# Altium PCB DualWheatstoneAmplifierV1.PcbDoc
Units mil, origin at the board's own origin, x right, y up, seen from the top; angles counter-clockwise.
Board outline 2338.58 x 1574.8 mil, 4 copper layers (Top Routing, GND Plane, Power, Bottom Routing), stack 30.634 mil thick; 74 components, 49 nets, 263 pads, 42 vias.
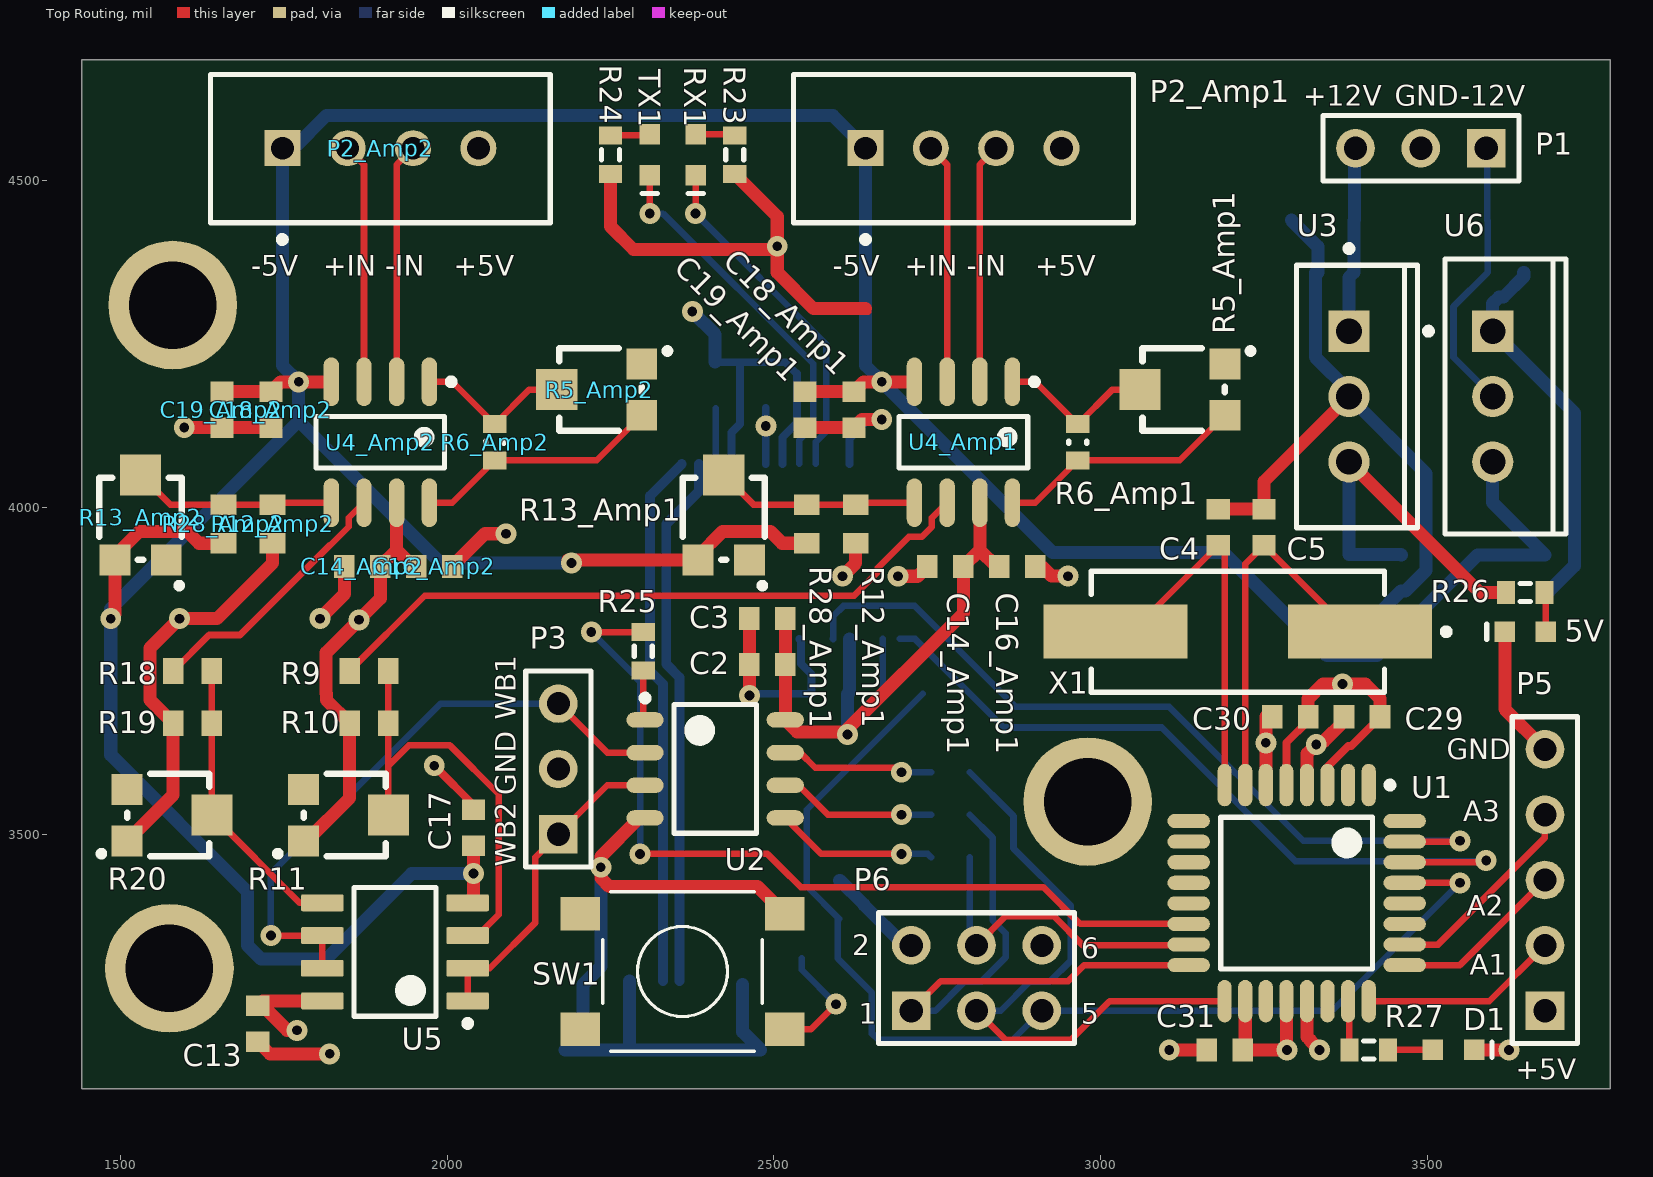
[diagram p0: Top Routing view]
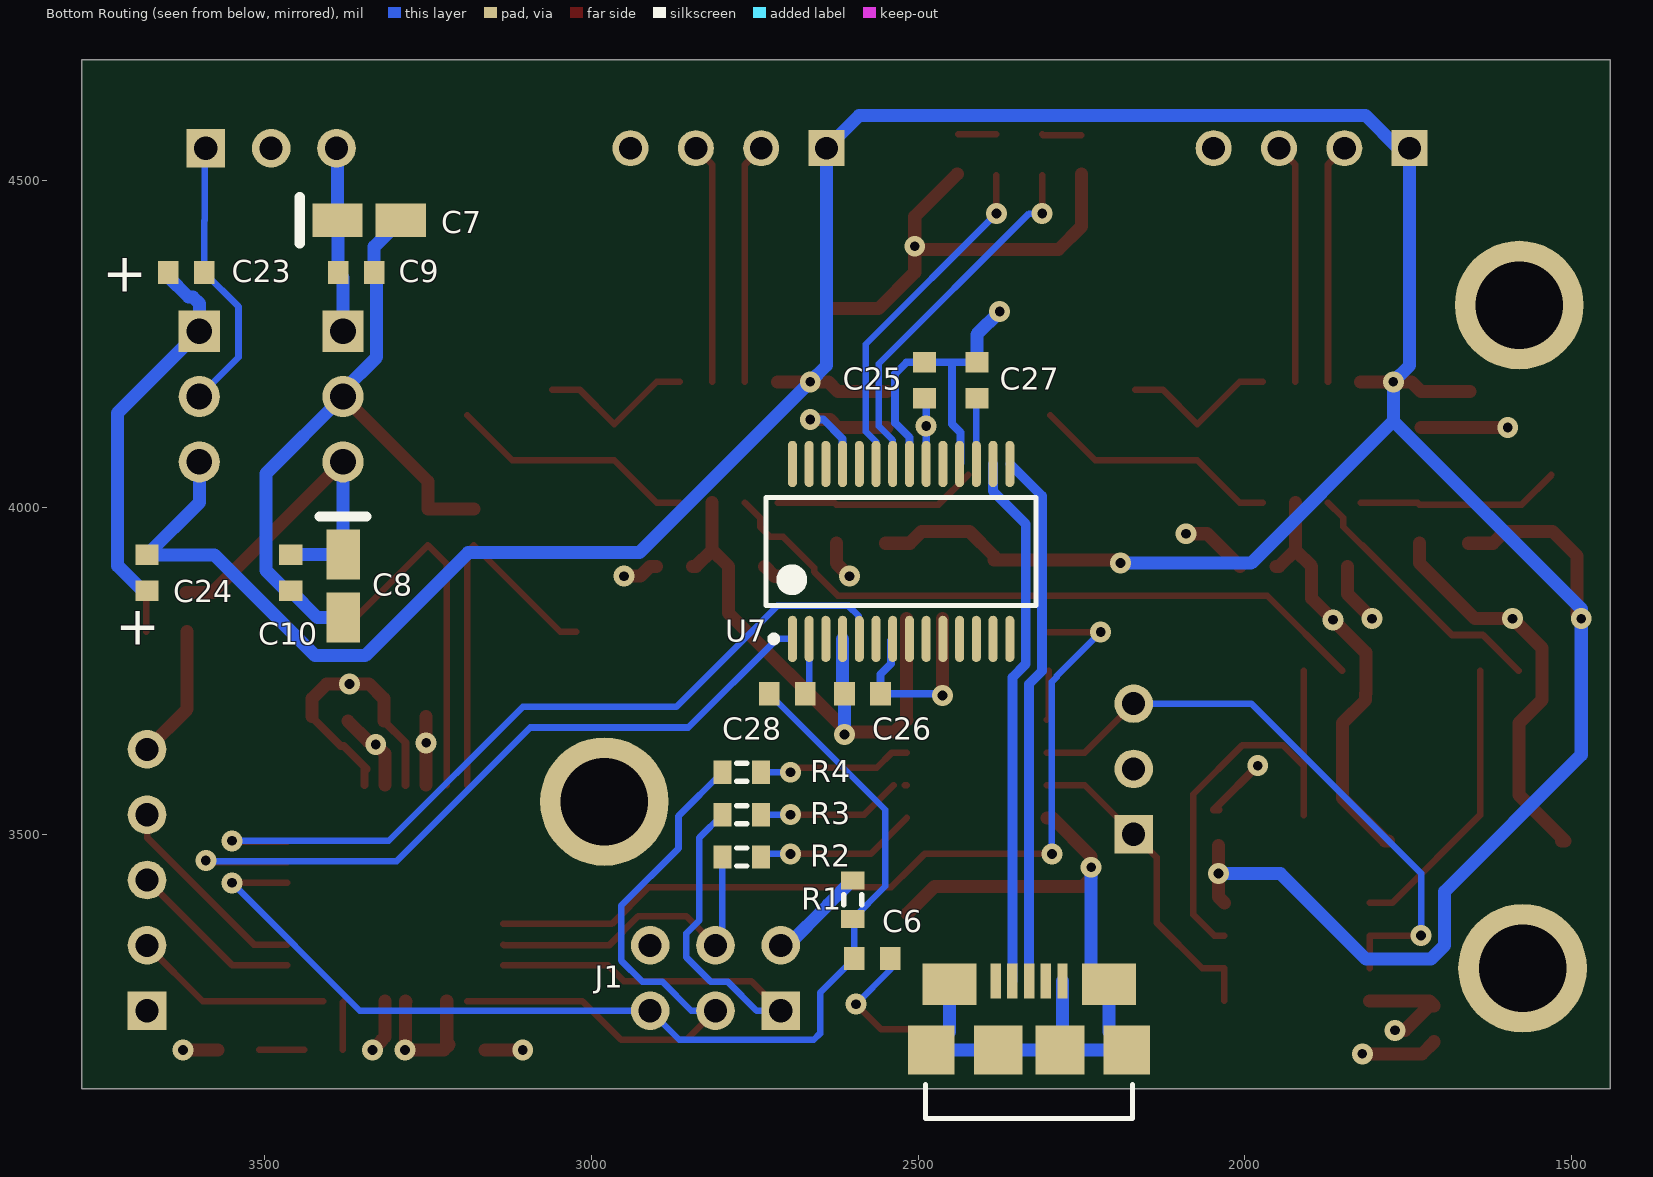
[diagram p1: Bottom Routing view, seen from below]
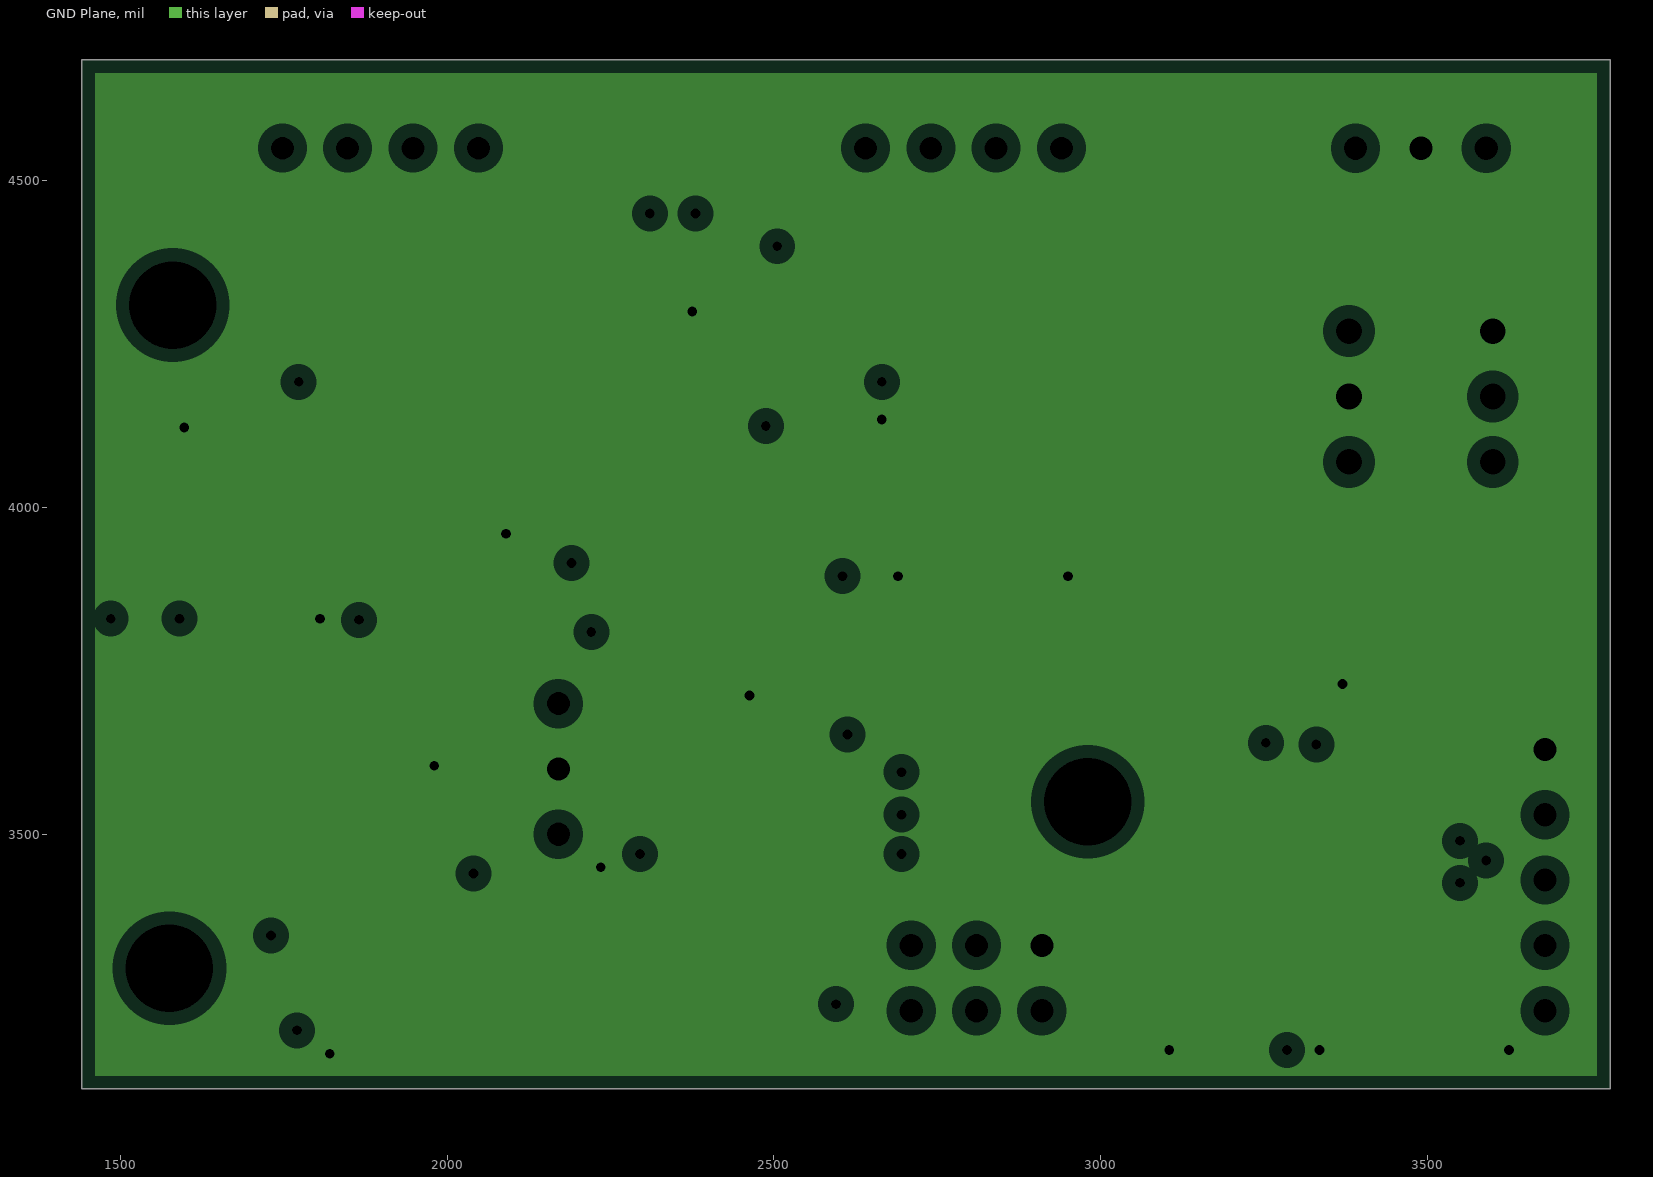
[diagram p2: GND Plane, clearances drawn from the general rule]
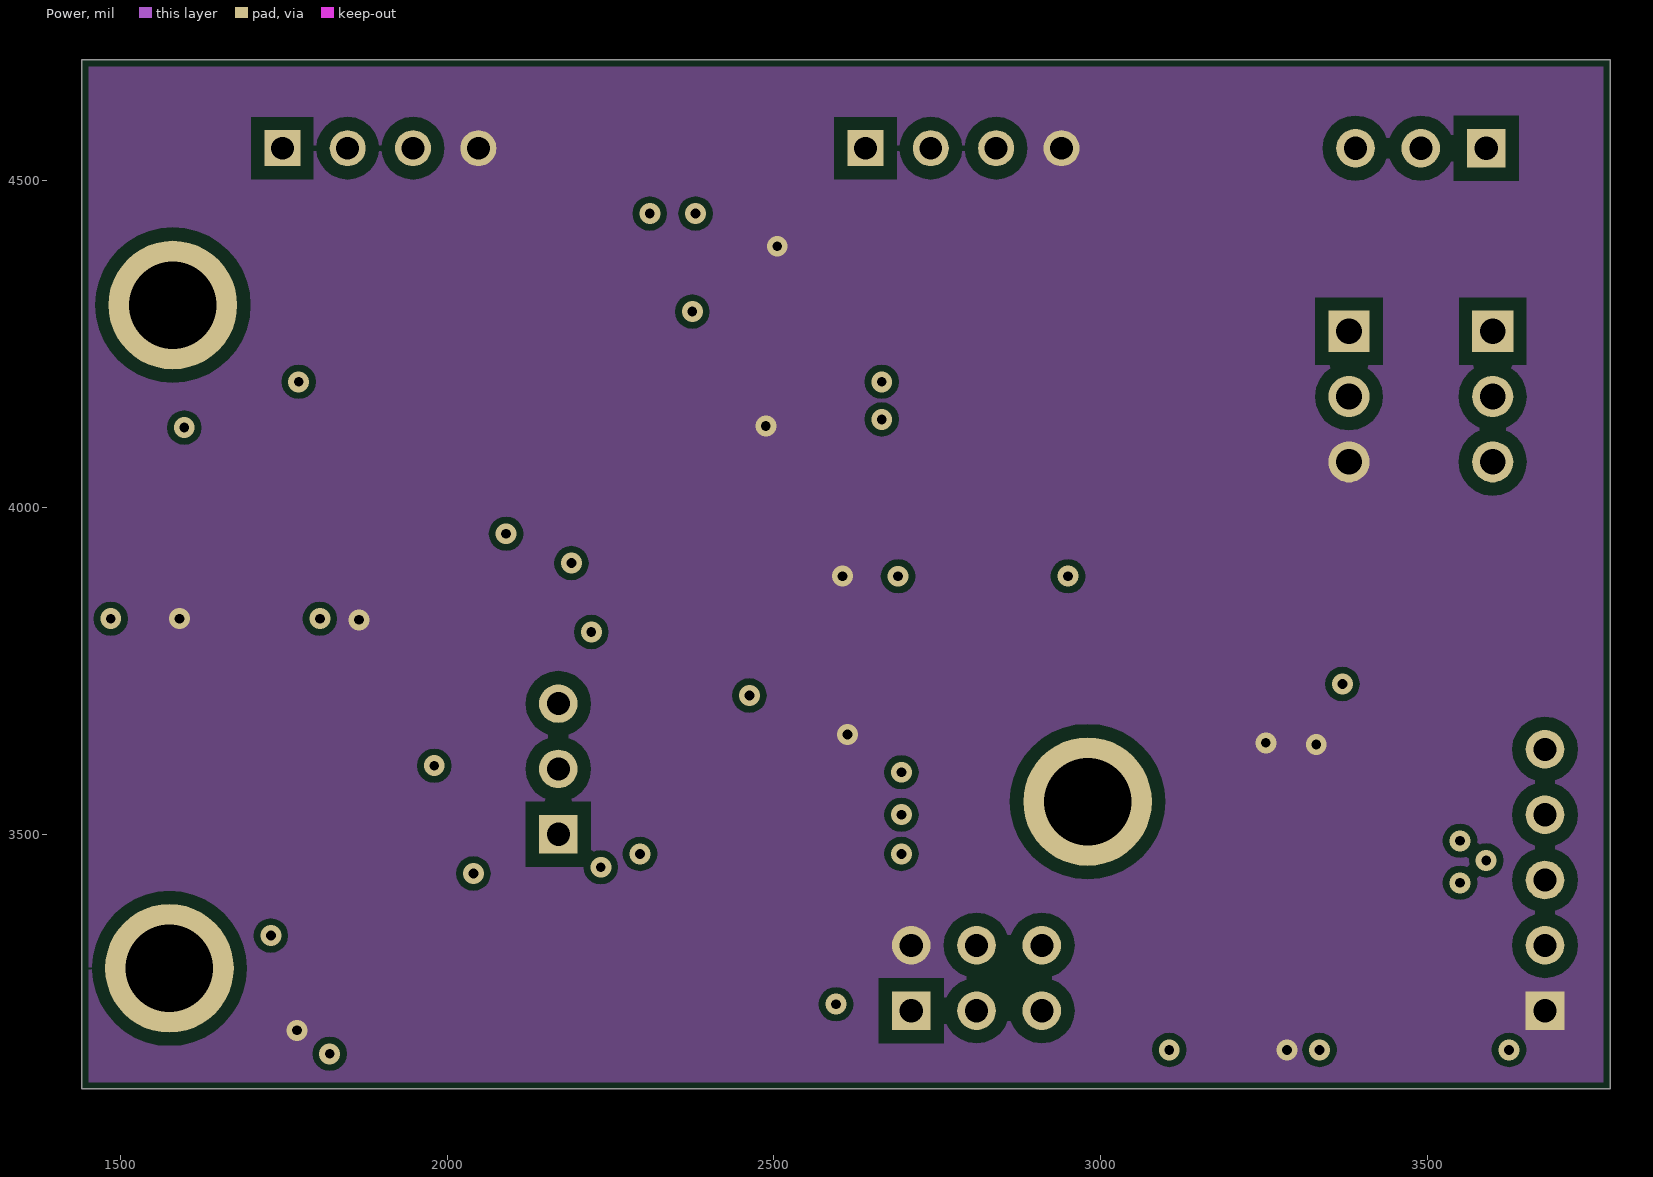
[diagram p3: Power]

## Layer stack, top to bottom
Top Solder: solder mask 0.4, Solder Resist, Dk 3.5
Top Routing: signal copper 1.4
Dielectric 1: core 10, FR-4, Dk 4.2
GND Plane: plane copper 1.417, net GND
Dielectric 3: prepreg 5, Dk 4.2
Power: signal copper 1.417
Dielectric 2: core 10, Dk 4.2
Bottom Routing: signal copper 1.4
Bottom Solder: solder mask 0.4, Solder Resist, Dk 3.5

## Board outline
3779.53,4685.04 1440.94,4685.04 1440.94,3110.24 3779.53,3110.24

## Design rules (kind name [scope] priority, off if disabled: settings)
BoardOutlineClearance [All] p1: gap=10 except(0: Arc-SplitContinuation Track-SplitContinuation SMDPad-SplitContinuation THPad-SplitContinuation Via-SplitContinuation Fill-SplitContinuation Poly-SplitContinuation Region-SplitContinuation Text-SplitContinuation)
Clearance [All] p1: gap=10 except(20: THPad-Poly)
DiffPairsRouting [All] p1: maxlimit=10 minlimit=10 mostfreqgap=10 toplayer_minwidth=15 toplayer_maxwidth=15 toplayer_prefwidth=15 midlayer1_minwidth=15 midlayer1_maxwidth=15 midlayer1_prefwidth=15 bottomlayer_minwidth=15 bottomlayer_maxwidth=15 bottomlayer_prefwidth=15 maxuncoupledlength=500
PlaneClearance [All] p1: clearance=20
PlaneConnect [All] p1: planeconnectstyle=Direct reliefexpansion=20 reliefentries=2 reliefconductorwidth=10 reliefairgap=10
PolygonConnect [All] p1: connectstyle=Direct reliefconductorwidth=10 reliefentries=4 polygonreliefangle="90 Angle" airgapwidth=10
RoomDefinition Amp1 [InComponentClass('Amp1')] p1: confinementstyle=ConfineIn formatcopy=TRUE lockcomponents=FALSE outline 2352.44,4670 2352.44,3880 3172.44,3880 3172.44,4670
RoomDefinition Amp2 [InComponentClass('Amp2')] p2: confinementstyle=ConfineIn formatcopy=TRUE lockcomponents=FALSE outline 1460,4670 1460,3880 2280,3880 2280,4670
RoutingVias [All] p1: holewidth=15 width=32 viastyle="Through Hole" minholewidth=15 minwidth=32 maxholewidth=15 maxwidth=32
SolderMaskExpansion [All] p1: expansion=4
Width Width_+12V [InNet('+12V')] p1: maxlimit=20 minlimit=20 preferedwidth=20
Width Width_GND [InNet('GND')] p2: maxlimit=20 minlimit=12 preferedwidth=20
Width Width_+5V [InNet('+5V')] p3: maxlimit=20 minlimit=12 preferedwidth=20
Width Width_-5V [InNet('-5V')] p4: maxlimit=20 minlimit=12 preferedwidth=20
Width [All] p5: maxlimit=10 minlimit=10 preferedwidth=10
27 further rules are at their usual default settings.

## Classes and differential pairs
channel class WheatstonePrimaryAmplifier: Amp1 Amp2
component class Amp2: C14_Amp2 C16_Amp2 C18_Amp2 C19_Amp2 P2_Amp2 R5_Amp2 R6_Amp2 R12_Amp2 R13_Amp2 R28_Amp2 U4_Amp2
component class Amp1: C14_Amp1 C16_Amp1 C18_Amp1 C19_Amp1 P2_Amp1 R5_Amp1 R6_Amp1 R12_Amp1 R13_Amp1 R28_Amp1 U4_Amp1
component class WB: C13 C17 P3 R9 R10 R11 R18 R19 R20 U5
component class F: C25 C26 C27 C28 J1 R23 R24 RX1 TX1 U7
component class Sheet1: 5V C2 C3 C4 C5 C6 C7 C8 C9 C10 C23 C24 C29 C30 C31 D1 P1 P5 P6 R1 R2 R3 R4 R25 R26 R27 SW1 U1 U2 U3 U6 X1
differential pair USB: +USB_P -USB_N

## Components (designator, comment, footprint, x,y, rotation, side; value= is the part's Value field where it differs from the comment)
5V "150060RS75000" 0603_A 3650,3810 r0 top
C2 "Cap Semi" 1608[0603] 2490,3760 r180 top
C3 "Cap Semi" 1608[0603] 2490,3830 r180 top
C4 "Cap Semi" 1608[0603] 3180,3970 r270 top
C5 "Cap Semi" 1608[0603] 3250,3970 r270 top
C6 "Cap Semi" 1608[0603] 2570,3310 r180 bottom
C7 "TAJA475K016RNJ" AVX-TAJ-A-2_N 3340,4440 r180 bottom
C8 "TAJA475K016RNJ" AVX-TAJ-A-2_N 3380,3880 r270 bottom
C9 "Cap Semi" 1608[0603] 3360,4360 r180 bottom
C10 "Cap Semi" 1608[0603] 3460,3900 r270 bottom
C13 "Cap Semi" 1608[0603] 1710,3210 r270 top
C14_Amp1 "Cap Semi" 1608[0603] 2762.44,3910 r180 top (schematic designator C14)
C14_Amp2 "Cap Semi" 1608[0603] 1870,3910 r180 top (schematic designator C14)
C16_Amp1 "Cap Semi" 1608[0603] 2872.44,3910 r0 top (schematic designator C16)
C16_Amp2 "Cap Semi" 1608[0603] 1980,3910 r0 top (schematic designator C16)
C17 "Cap Semi" 1608[0603] 2040,3510 r90 top
C18_Amp1 "Cap Semi" 1608[0603] 2622.44,4150 r270 top (schematic designator C18)
C18_Amp2 "Cap Semi" 1608[0603] 1730,4150 r270 top (schematic designator C18)
C19_Amp1 "Cap Semi" 1608[0603] 2547.44,4150 r270 top (schematic designator C19)
C19_Amp2 "Cap Semi" 1608[0603] 1655,4150 r270 top (schematic designator C19)
C23 "Cap Semi" 1608[0603] 3620,4360 r0 bottom
C24 "Cap Semi" 1608[0603] 3680,3900 r270 bottom
C25 "Cap Semi" 1608[0603] 2490,4195 r90 bottom
C26 "Cap Semi" 1608[0603] 2585,3715 r0 bottom
C27 "Cap Semi" 1608[0603] 2410,4195 r270 bottom
C28 "Cap Semi" 1608[0603] 2700,3715 r0 bottom
C29 "Cap Semi" 1608[0603] 3400,3680 r0 top
C30 "Cap Semi" 1608[0603] 3290,3680 r0 top
C31 "Cap Semi" 1608[0603] 3190,3170 r180 top
D1 "150060RS75000" 0603_A 3540,3170 r180 top
J1 "10118192-0001LF" FCI-10118192-0001LF-5_V 2330,3170 r180 bottom
P1 "Header 3" HDR1X3 3590,4550 r180 top
P2_Amp1 "SG" TECO-5-103414-2_V 2790,4550 r0 top (schematic designator P2)
P2_Amp2 "SG" TECO-5-103414-2_V 1897.56,4550 r0 top (schematic designator P2)
P3 "Header 3" HDR1X3 2170,3500 r90 top
P5 "Header 5" HDR1X5 3680,3230 r90 top
P6 "Header 3X2" HDR2X3 2710,3230 r0 top
R1 "Res3" J1-0603 2600,3400 r90 bottom
R2 "Res3" J1-0603 2770,3465 r0 bottom
R3 "Res3" J1-0603 2770,3530 r0 bottom
R4 "Res3" J1-0603 2770,3595 r0 bottom
R5_Amp1 "500" Trimpot_Cut_tape_3.4x3.4x2 3190,4220 r270 top (schematic designator R5)
R5_Amp2 "500" Trimpot_Cut_tape_3.4x3.4x2 2297.56,4220 r270 top (schematic designator R5)
R6_Amp1 "510" RESC0603(1608)_L 2965,4100 r90 top (schematic designator R6)
R6_Amp2 "510" RESC0603(1608)_L 2072.56,4100 r90 top (schematic designator R6)
R9 "10k" RESC1608X55X25ML10T15 1880,3750 r180 top
R10 "200K" RESC1608X55X25ML10T15 1880,3670 r0 top
R11 "20k" Trimpot_Cut_tape_3.4x3.4x2 1780,3490 r90 top
R12_Amp1 "1k" RESC1608X55X25ML10T15 2625,3975 r270 top (schematic designator R12)
R12_Amp2 "1k" RESC1608X55X25ML10T15 1732.56,3975 r270 top (schematic designator R12)
R13_Amp1 "20k" Trimpot_Cut_tape_3.4x3.4x2 2462.44,3920 r180 top (schematic designator R13)
R13_Amp2 "20k" Trimpot_Cut_tape_3.4x3.4x2 1570,3920 r180 top (schematic designator R13)
R18 "10k" RESC1608X55X25ML10T15 1610,3750 r180 top
R19 "200K" RESC1608X55X25ML10T15 1610,3670 r0 top
R20 "20k" Trimpot_Cut_tape_3.4x3.4x2 1510,3490 r90 top
R23 "Res3" J1-0603 2440,4540 r90 top
R24 "Res3" J1-0603 2250,4540 r90 top
R25 "Res3" J1-0603 2300,3780 r90 top
R26 "Res3" J1-0603 3650,3870 r180 top
R27 "Res3" J1-0603 3410,3170 r180 top
R28_Amp1 "1k" RESC1608X55X25ML10T15 2550,3975 r90 top (schematic designator R28)
R28_Amp2 "1k" RESC1608X55X25ML10T15 1657.56,3975 r90 top (schematic designator R28)
RX1 "150060RS75000" 0603_A 2380,4540 r90 top
SW1 "430152043826" 430152043826 2360,3290 r180 top
TX1 "150060RS75000" 0603_A 2310,4540 r90 top
U1 "ATmega88PA-AUR" 32A_N 3300,3410 r270 top
U2 "ADC_LTC1865" LTC1865_SOIC8 2410,3600 r0 top
U3 "LM7805ACT" FAIR-TO-220-3 3380,4170 r0 top
U4_Amp1 "LT1920" LT-S8-8_L 2790,4100 r270 top (schematic designator U4)
U4_Amp2 "LT1920" LT-S8-8_L 1897.56,4100 r270 top (schematic designator U4)
U5 "NE5532ADR" D0008A_M 1920,3320 r180 top
U6 "LM7905CT/NOPB" NDE0003A 3600,4170 r270 top
U7 "FT232RL-Reel" SSOP-28_L 2525.91,3932.91 r90 bottom
X1 "ABLS2-16.000MHZ-D4Y-T" ABRA-ABLS2-2_V 3210,3810 r180 top

## Footprints (in the part's own frame and the unit in brackets; to place one, negate y for a bottom-side part, rotate by r counter-clockwise, add the part's x,y. Pads: shape width x height; smd on the part's side, far side on the other; paste and mask are expansions set on the pad)
32A_N [mm] "Thin QFP, 32-Leads, Body 7x7mm, Pitch 0.8mm, IPC Medium Density"
  oval 1.65x0.55 smd: 1(-4.2,2.8) 2(-4.2,2) 3(-4.2,1.2) 4(-4.2,0.4) 5(-4.2,-0.4) 6(-4.2,-1.2) 7(-4.2,-2) 8(-4.2,-2.8) 17(4.2,-2.8) 18(4.2,-2) 19(4.2,-1.2) 20(4.2,-0.4) 21(4.2,0.4) 22(4.2,1.2) 23(4.2,2) 24(4.2,2.8)
  oval 0.55x1.65 smd: 9(-2.8,-4.2) 10(-2,-4.2) 11(-1.2,-4.2) 12(-0.4,-4.2) 13(0.4,-4.2) 14(1.2,-4.2) 15(2,-4.2) 16(2.8,-4.2) 25(2.8,4.2) 26(2,4.2) 27(1.2,4.2) 28(0.4,4.2) 29(-0.4,4.2) 30(-1.2,4.2) 31(-2,4.2) 32(-2.8,4.2)
  silkscreen extent -4.32,-2.95 2.95,3.75, body extent -3.5,-3.5 3.5,3.5, height 1.2
0603_A [mm] "Chip LED, 2-Leads, Body 1.6x0.8mm, IPC Medium Density"
  rect 0.8x0.8 smd: 1(-0.8,0) 2(0.8,0)
  silkscreen extent -1.5,-0.3 -1.5,0.3, body extent -0.8,-0.4 0.8,0.4, height 0.7
1608[0603] [mm] "Chip Capacitor, Body 1.6x0.8mm, IPC High Density"
  rect 0.8x0.9 smd: 1(-0.7,0) 2(0.7,0)
  body extent -0.87,-0.48 0.87,0.48, height 1.3
430152043826 [mm] "6*6mm vertical type, SMD, height 4.3mm, white actuator, 260gf, T&R"
  rect 1.55x1.3 smd: 1(-3.975,2.25) 2(-3.975,-2.25) 3(3.975,2.25) 4(3.975,-2.25)
  silkscreen extent -3.1,-3.1 3.1,3.1, body extent -4.5,-3.1 4.5,3.1, height 4.29
ABRA-ABLS2-2_V [mm] "SMD, 2-Leads, Body 11.4x4.7mm, Height 3.3mm"
  rect 5.6x2.1 smd: 1(-4.75,0) 2(4.75,0)
  silkscreen extent -8.23,-2.35 5.7,2.35, body extent -5.7,-2.35 5.7,2.35, height 3.3
AVX-TAJ-A-2_N [mm] "Molded Capacitor, 2-Leads, Body 3.4x1.8mm, IPC Medium Density"
  rect 1.95x1.3 smd: 1(-1.225,0) 2(1.225,0)
  silkscreen extent -2.7,-0.9 -2.7,0.9, body extent -1.92,-0.9 1.92,0.9, height 1.8
D0008A_M [mm] "SOIC, 8-Leads, Body 5x4mm, Pitch 1.27mm, IPC Low Density"
  rrect15% 1.65x0.65 smd: 1(-2.825,1.905) 2(-2.825,0.635) 3(-2.825,-0.635) 4(-2.825,-1.905) 5(2.825,-1.905) 6(2.825,-0.635) 7(2.825,0.635) 8(2.825,1.905)
  silkscreen extent -2.95,-2.5 1.6,2.9, body extent -3,-2.45 3,2.45, height 1.63
FAIR-TO-220-3 [mm] "FM, 3-Leads, Body 10.2x4.7mm, Pitch 2.54mm"
  rect 1.6x1.6 hole 1: 1(0,2.54)
  round 1.6 hole 1: 2(0,0) 3(0,-2.54)
  silkscreen extent -2.04,-5.1 2.66,5.87, body extent -2.04,-5.1 2.66,5.1, height 18.95
FCI-10118192-0001LF-5_V [mm] "SMD, 5-Leads, Body 8.05x5.77mm, Pitch 0.65mm"
  rect 0.4x1.35 smd: 1(-1.3,2.675) 2(-0.65,2.675) 3(0,2.675) 4(0.65,2.675) 5(1.3,2.675)
  rect 2.1x1.6 smd: 6(-3.1,2.55) 7(3.1,2.55)
  rect 1.8x1.9 smd: 8(-3.8,0) 9(3.8,0)
  rect 1.9x1.9 smd: 10(-1.2,0) 11(1.2,0)
  silkscreen extent -4.03,-2.67 4.03,-1.35, body extent -4.03,-2.67 4.03,3.1, height 2.7
HDR1X3 [mm] "Connector; Header; 3 Position"
  rect 1.5x1.5 hole 0.9: 1(0,0)
  round 1.5 hole 0.9: 2(2.54,0) 3(5.08,0)
  silkscreen extent -1.27,-1.27 6.35,1.27
HDR1X5 [mm] "Connector; Header; 5 Position"
  rect 1.5x1.5 hole 0.9: 1(0,0)
  round 1.5 hole 0.9: 2(2.54,0) 3(5.08,0) 4(7.62,0) 5(10.16,0)
  silkscreen extent -1.27,-1.27 11.43,1.27
HDR2X3 [mm] "Connector; Header; 3x2 Position"
  rect 1.5x1.5 hole 0.9: 1(0,0)
  round 1.5 hole 0.9: 2(0,2.54) 3(2.54,0) 4(2.54,2.54) 5(5.08,0) 6(5.08,2.54)
  silkscreen extent -1.27,-1.27 6.35,3.81
J1-0603 [mm] "Chip Resistor, Body 1.6x0.8mm, IPC High Density"
  rect 0.7x0.9 smd: 1(-0.75,0) 2(0.75,0)
  silkscreen extent -0.2,-0.35 0.2,0.35, body extent -0.85,-0.48 0.85,0.48, height 0.9
LT-S8-8_L [mm] "SOIC, 8-Leads, Body 4.9x3.9mm, Pitch 1.27mm, IPC High Density"
  oval 1.9x0.6 smd: 1(-2.35,1.905) 2(-2.35,0.635) 3(-2.35,-0.635) 4(-2.35,-1.905) 5(2.35,-1.905) 6(2.35,-0.635) 7(2.35,0.635) 8(2.35,1.905)
  silkscreen extent -2.47,-2.5 1,2.88, body extent -2,-2.5 2,2.5, height 1.76
LTC1865_SOIC8 [mm] "SOIC, 8-Leads, Body 4.90x3.90mm, Pitch 1.27mm, IPC Medium Density"
  oval 1.45x0.6 smd: 1(-2.725,1.905) 2(-2.725,0.635) 3(-2.725,-0.635) 4(-2.725,-1.905) 5(2.725,-1.905) 6(2.725,-0.635) 7(2.725,0.635) 8(2.725,1.905)
  silkscreen extent -2.85,-2.5 1.6,2.88, body extent -2,-2.5 2,2.5, height 1.76
NDE0003A [mm] "FM, 3-Leads, Body 10.7x4.7mm, Pitch 2.54mm"
  rect 1.6x1.6 hole 1: 1(-2.54,0)
  round 1.6 hole 1: 2(0,0) 3(2.54,0)
  silkscreen extent -5.35,-2.62 5.35,2.85, body extent -5.4,-1.9 5.4,2.9, height 19.4
RESC0603(1608)_L [mm] "Chip Resistor, Body 1.6x0.8mm, IPC High Density"
  rect 0.7x0.9 smd: 1(-0.7,0) 2(0.7,0)
  silkscreen extent -0.05,-0.35 0.05,0.35, body extent -0.85,-0.47 0.85,0.47, height 0.6
RESC1608X55X25ML10T15 [mm] "Chip Resistor, 2-Leads, Body 1.70x0.90mm, IPC Low Density"
  rect 0.8x1 smd: 1(-0.75,0) 2(0.75,0)
  body extent -0.85,-0.45 0.85,0.45, height 0.55
SSOP-28_L [mm] "SOP, 28-Leads, Body 10.2x5.3mm, Pitch 0.65mm, IPC High Density"
  oval 1.8x0.35 smd: 1(-3.4,4.225) 2(-3.4,3.575) 3(-3.4,2.925) 4(-3.4,2.275) 5(-3.4,1.625) 6(-3.4,0.975) 7(-3.4,0.325) 8(-3.4,-0.325) 9(-3.4,-0.975) 10(-3.4,-1.625) 11(-3.4,-2.275) 12(-3.4,-2.925) 13(-3.4,-3.575) 14(-3.4,-4.225) 15(3.4,-4.225) 16(3.4,-3.575) 17(3.4,-2.925) 18(3.4,-2.275) 19(3.4,-1.625) 20(3.4,-0.975) 21(3.4,-0.325) 22(3.4,0.325) 23(3.4,0.975) 24(3.4,1.625) 25(3.4,2.275) 26(3.4,2.925) 27(3.4,3.575) 28(3.4,4.225)
  silkscreen extent -3.52,-5.25 2.1,5.25, body extent -2.8,-5.25 2.8,5.25, height 2
TECO-5-103414-2_V [mm] "Male Header, 4-Leads, Body 5.7658 x 13.208mm, Pitch 2.54mm"
  rect 1.4x1.4 hole 0.889: 1(-3.81,0)
  round 1.4 hole 0.889: 2(-1.27,0) 3(1.27,0) 4(3.81,0)
  silkscreen extent -6.6,-3.67 6.6,2.87, body extent -6.6,-2.89 6.6,2.87, height 13.94
Trimpot_Cut_tape_3.4x3.4x2 [mm]
  rect 1.2x1.2 smd: 1(0,0) 3(2,0)
  rect 1.6x1.6 smd: 2(1,-3.3)
  silkscreen extent -0.6,-3.2 2.6,1.1

## Part data
5V D1 RX1 TX1: library part CMP-1426-00001-1, "SMD mono-color Chip LED, WL-SMCW, Red"
C2 C3 C4 C5 C6 C9 C10 C13 C14_Amp1 C14_Amp2 C16_Amp1 C16_Amp2 C17 C18_Amp1 C18_Amp2 C19_Amp1 C19_Amp2 C23 C24 C25 C26 C27 C28 C29 C30 C31: "Capacitor (Semiconductor SIM Model)"
C7 C8: library part CMP-2100-03687-1, "Standard Tantalum, 4.7 uF, +/- 10%, 16 V, -55 to 125 degC, 2-Pin SMD (1206), RoHS, Tape and Reel"
J1: library part CMP-2000-05118-1, "Micro USB B Type Receptacle, -55 to 85 degC, 5-Pin SMD, RoHS, Tape and Reel"
P1 P3: "Header, 3-Pin"
P2_Amp1 P2_Amp2: library part CMP-2000-05625-1, "Male Header, Pitch 2.54 mm, 1 x 4 Position, Height 14.199 mm, Tail Length 3.302 mm, -55 to 105 degC, RoHS, Rail/Tube"
P5: "Header, 5-Pin"
P6: "Header, 3-Pin, Dual row"
R1 R2 R3 R4 R23 R24 R25 R26 R27: "Resistor"
R5_Amp1 R5_Amp2 R11 R13_Amp1 R13_Amp2 R20: library part Component_1
R6_Amp1 R6_Amp2: library part CMP-1012-00067-1, "510R 0.1W 5% 0603 (1608 Metric)  SMD"
R9 R10 R12_Amp1 R12_Amp2 R18 R19 R28_Amp1 R28_Amp2: library part CMP-1659-00009-3, "Chip Resistor, 1 KOhm, +/-1%, 0.1 W, -55 to 155 degC, 0603 (1608 Metric), RoHS, Tape and Reel"
SW1: library part CMP-1452-00001-1, "WS-TASV SMD Tact Switch 6X6 mm"
U1: library part CMP-0095-00212-2, "8-bit AVR Microcontroller, 8KB Flash, 512 Bytes EEPROM, 1KB SRAM, 32-pin TQFP, Industrial Grade (-40°C to 85°C), Reel"
U3: library part CMP-2000-04937-1, "Positive Voltage Regulator, 5 V, 1 A, 0 to 125 degC, 3-Pin TO-220, RoHS, Tube"
U4_Amp1 U4_Amp2: library part CMP-0359-03370-2, "Single Channel, Resistor Gain Programmable, Precision Instrumentation Operational Amplifier, 0.8 MHz Typical GBW, 1.2 V/us Typical SR, 4.6 to 40 V, 8-Pin SOIC (S8-8), Commercial, Pb-Free"
U5: library part CMP-0017-00450-2, "Dual Low-Noise Operational Amplifier, 10 to 30 V, 0 to 70 degC, 8-pin SOIC (D8), Green (RoHS & no Sb/Br)"
U6: library part CMP-0062-02481-3, "3-Terminal Negative Regulator, 3-pin TO-220, Pb-Free"
U7: library part CMP-0078-00029-3, "USB UART Asynchronous Serial Data Transfer Chip, 28-pin SSOP, Tape and Reel"
X1: library part CMP-0277-00002-1, "Low Profile Surface Mount Microprocessor Crystal, 16.000 MHz +/-30 ppm, 180 Ohm, -40 to 85 degC, 2-Pin 11.4 x 4.7 x 3.3 mm SMD, RoHS, Tape and Reel"

## Free pads (board coordinates)
  round 196.85 hole 133.86: 0(1574.8,3294.82) 0(1580,4310) 0(2980,3550)

## Via types
v1: diameter 32, hole 15, Top Routing to Bottom Routing, 42 vias

## Nets (pads, with @x,y where several pads share a name; then routed paths per layer and width w, separated by ;. In a path a pad name is that pad's centre, name@x,y a point inside that pad or via, vN(x,y) a via of type N, cw(c..) or ccw(c..) an arc to the next point about the centre after c; other vN are vias at no path point)
+5V: C2.1 C3.1 C8.1 C10.1 C13.1 C14_Amp1.1 C14_Amp2.1 C16_Amp1.1 C16_Amp2.1 C25.1 C26.2 C29.1 C30.1 C31.1 P2_Amp1.4 P2_Amp2.4 P5.1 P6.2 R1.2 R10.1 R11.1 R12_Amp1.2 R12_Amp2.2 R19.1 R20.1 R23.1 R24.1 R26.2 U1.4 U1.6 U1.18 U1.20 U2.8 U3.3 U4_Amp1.7 U4_Amp2.7 U5.8 U7.4 U7.20 | length 4297.1
  Top Routing w10: 2640,4304.53 2644.53,4300
  Top Routing w20: R20.1@1515,3490 R20.1 1580.47,3560.47 R19.1 1544.72,3705.75 1544.72,3784.72 v1(1590,3830) 1647.56,3830 1732.56,3915 R12_Amp2.2 ; v1(1770,3200) 1755,3200 1717.44,3237.56 C13.1 1717.44,3245 U5.8 ; R11.1 1785,3490 1850.47,3555.47 R10.1 1815,3705.47 1815,3715.6 1814.72,3715.88 1814.72,3777.97 1897.56,3860.8 C14_Amp2.1 1922.56,3935 ; U4_Amp2.7 1922.56,3935 ; C16_Amp2.1 1947.56,3910 1922.56,3935 ; R24.1 2250,4430 2285,4395 2500,4395 v1(2505,4400) ; R23.1 2505,4445.47 v1(2505,4400) ; C3.1 C2.1 2517.56,3675.28 U2.8 2535.47,3656.81 2608.3,3656.81 2790,3838.51 C14_Amp1.1 2815,3935 ; v1(2605,3895) 2625,3915 R12_Amp1.2 ; 2640,4304.53 2560.47,4304.53 2505,4360 v1(2505,4400) ; U4_Amp1.7 2815,3935 ; C16_Amp1.1 2840,3910 2815,3935 ; U1.18 3221.26,3181.65 3217.56,3177.95 3225.51,3170 v1(3285,3170) 3284.25,3170.75 U1.20 U1.20@3283.58,3243.98 ; U1.6 C30.1@3252.76,3680 ; U1.4 3315.75,3623.31 3334.72,3642.28 3341.59,3642.28 C29.1@3372.44,3673.13 ; U3.3 3580,3870 R26.2
  Bottom Routing w12: U7.20 C25.1@2487.52,4152.44
  Bottom Routing w20: R1.2 2600.73,3429.53 2637.72,3392.54 2637.72,3391.81 2699.53,3330 P6.2 ; v1(2612.56,3652.56) C26.2 ; C26.2@2615,3717.56 2615.47,3718.03 U7.4 ; U3.3 C8.1 3459.33,3928.23 C10.1
  other v1: 3330,3637.56 3252.76,3640 1865,3828.24 2487.52,4125
+12V: C7.1 C9.1 P1.3 U3.1 | length 284.1
  Bottom Routing w20: U3.1 3380,4352.44 C9.1 3387.56,4439.33 C7.1 3388.23,4548.23 P1.3
-5V: C17.1 C18_Amp1.1 C18_Amp2.1 C19_Amp1.1 C19_Amp2.1 C24.1 P2_Amp1.1 P2_Amp2.1 R13_Amp1.3 R13_Amp2.3 R28_Amp1.1 R28_Amp2.1 U4_Amp1.4 U4_Amp2.4 U5.4 U6.3 | length 6202.9
  Top Routing w20: v1(1485,3830) 1491.26,3836.26 R13_Amp2.3 1491.26,3925.95 1528.94,3963.62 1601.91,3963.62 1620.06,3945.47 R28_Amp2.1 ; C19_Amp2.1 C18_Amp2.1 1744.96,4192.52 v1(1772.56,4192.52) U4_Amp2.4 ; U5.4 2040,3403.78 C17.1 ; v1@2185,3920 R13_Amp1.3 2383.7,3925.95 2421.38,3963.62 2494.35,3963.62 2512.5,3945.47 R28_Amp1.1 ; C19_Amp1.1 C18_Amp1.1 2637.4,4192.52 v1(2665,4192.52) U4_Amp1.4
  Bottom Routing w20: v1(2040,3440) 1945.36,3440 1814.36,3309 1715.09,3309 1694,3330.09 1694,3412.47 1485,3621.47 v1(1485,3830) 1485,3845 1772.56,4132.56 ; v1(2190,3915) 1990.12,3915 1772.56,4132.56 ; U6.3 3600,4007.56 C24.1 3576.86,3927.56 3422.69,3773.39 3346.12,3773.39 3188.51,3931 2926.52,3931 v1(2665,4192.52) 2640,4217.52 P2_Amp1.1 2590,4600 1815,4600 1765,4550 P2_Amp2.1 1747.56,4217.52 v1(1772.56,4192.52) 1772.56,4132.56
-12V: C23.1 P1.1 U6.2 | length 427.6
  Bottom Routing w10: P1.1 3591.77,4548.23 3591.77,4440 3592.44,4439.33 C23.1 3540,4307.56 3540,4230 U6.2
ADC1: P5.2 U1.24 | length 305.1
  Top Routing w10: U1.24 3594.65,3244.65 P5.2
ADC2: P5.3 U1.25 | length 268.6
  Top Routing w10: U1.25 3549.76,3299.76 P5.3
ADC3: P5.4 U1.26 | length 317.5
  Top Routing w10: U1.26 3516.26,3331.26 3680,3495 P5.4
ADC_CONV: R25.1 U2.1 | length 76.6
  Top Routing w10: R25.1 2300,3677.72 U2.1
ADC_SCK: R4.1 U2.7 | length 235.6
  Top Routing w10: U2.7 2540,3625 2563.19,3601.81 2688.19,3601.81 v1(2695,3595)
  Bottom Routing w10: v1(2695,3595) R4.1
ADC_SDI: R2.1 U2.5 | length 248
  Top Routing w10: U2.5 2572.29,3470 v1(2695,3470)
  Bottom Routing w10: v1(2695,3470) 2735.47,3470 R2.1
ADC_SDO: R3.1 U2.6 | length 224.7
  Top Routing w10: U2.6 U2.6@2520,3575 ; U2.6@2537.29,3575.35 2582.64,3530 v1(2695,3530)
  Bottom Routing w10: v1(2695,3530) R3.1
AMP_GAIN_1_Amp1: R5_Amp1.2 R6_Amp1.2 U4_Amp1.1 | length 244
  Top Routing w10: U4_Amp1.1 2900.04,4192.52 R6_Amp1.2 3018.07,4180.63 R5_Amp1.2
AMP_GAIN_1_Amp2: R5_Amp2.2 R6_Amp2.2 U4_Amp2.1 | length 244
  Top Routing w10: U4_Amp2.1 2007.6,4192.52 R6_Amp2.2 2125.63,4180.63 R5_Amp2.2
AMP_GAIN_2_Amp1: R5_Amp1.3 R6_Amp1.1 U4_Amp1.8 | length 380.4
  Top Routing w10: U4_Amp1.8 2900.04,4007.48 R6_Amp1.1 3121.18,4072.44 R5_Amp1.3
AMP_GAIN_2_Amp2: R5_Amp2.3 R6_Amp2.1 U4_Amp2.8 | length 380.4
  Top Routing w10: U4_Amp2.8 2007.6,4007.48 R6_Amp2.1 2228.74,4072.44 R5_Amp2.3
AMP_INPUT_NEG_Amp1: P2_Amp1.3 U4_Amp1.2 | length 367.8
  Top Routing w10: U4_Amp1.2 2815,4525 P2_Amp1.3
AMP_INPUT_NEG_Amp2: P2_Amp2.3 U4_Amp2.2 | length 367.8
  Top Routing w10: U4_Amp2.2 1922.56,4525 P2_Amp2.3
AMP_INPUT_POS_Amp1: P2_Amp1.2 U4_Amp1.3 | length 367.8
  Top Routing w10: P2_Amp1.2 2765,4525 U4_Amp1.3
AMP_INPUT_POS_Amp2: P2_Amp2.2 U4_Amp2.3 | length 367.8
  Top Routing w10: P2_Amp2.2 1872.56,4525 U4_Amp2.3
AMP_REF_V_Amp1: R12_Amp1.1 R13_Amp1.2 R28_Amp1.2 U4_Amp1.5 | length 312
  Top Routing w10: R13_Amp1.2 2468.46,4004.53 R28_Amp1.2 R12_Amp1.1 2627.95,4007.48 U4_Amp1.5
AMP_REF_V_Amp2: R12_Amp2.1 R13_Amp2.2 R28_Amp2.2 U4_Amp2.5 | length 312
  Top Routing w10: R13_Amp2.2 1576.02,4004.53 R28_Amp2.2 R12_Amp2.1 1735.51,4007.48 U4_Amp2.5
ANALOG_OUT_Amp1: R9.2 U4_Amp1.6 | length 1032.7
  Top Routing w10: R9.2 1965.47,3865 2622.52,3865 2659,3901.48 2659,3907.72 2706.36,3955.08 2726.11,3955.08 2741.81,3970.78 2741.81,3984.29 U4_Amp1.6
ANALOG_OUT_Amp2: R18.2 U4_Amp2.6 | length 406.4
  Top Routing w10: R18.2 1635.47,3805 1682.76,3805 1820.48,3942.72 ; 1820.89,3942.31 1849.37,3970.78 1849.37,3984.29 U4_Amp2.6
CONV: R25.2 U1.14 | length 1334
  Top Routing w10: v1(2220.47,3809.53) R25.2 ; v1(2295,3470) 2490,3470 2510,3450 2540.83,3419.17 2912.08,3419.17 2968.5,3362.76 U1.14
  Bottom Routing w10: v1(2220.47,3809.53) 2287.68,3742.32 2287.68,3740.73 2295,3733.41 v1(2295,3470)
DTR: C28.1 U7.2 | length 82.9
  Bottom Routing w10: U7.2 2666.65,3720.91 C28.1@2670,3717.56
FTDI_RST: C6.1 C28.2 P6.5 R1.1 U1.29 | length 1725.1
  Top Routing w10: U1.29 v1(3550,3425.75)
  Bottom Routing w10: C28.2 2550,3537.44 2550,3420.48 R1.1 2597.56,3368.03 C6.1 2650,3257.56 2650,3195 2659.53,3185.47 2865.47,3185.47 P6.5 3354.25,3230 v1(3550,3425.75)
FTDI_RX: U1.31 U7.5 | length 1236.1
  Top Routing w10: U1.31 3548.74,3488.74 v1(3550,3490)
  Bottom Routing w10: U7.5 2590.47,3798.46 2590.47,3833.55 2606.41,3849.49 2715.51,3849.49 2870,3695 3105,3695 3310,3490 v1(3550,3490)
FTDI_TX: U1.30 U7.1 | length 1164.8
  Top Routing w10: U1.30 3587.24,3457.24 v1(3590,3460)
  Bottom Routing w10: U7.1 2715.95,3799.05 2851.57,3663.43 3093.43,3663.43 3297.85,3459 3589,3459 v1(3590,3460)
GND: 5V.1 C2.2 C3.2 C4.1 C5.1 C7.2 C8.2 C9.2 C10.2 C13.2 C14_Amp1.2 C14_Amp2.2 C16_Amp1.2 C16_Amp2.2 C17.2 C18_Amp1.2 C18_Amp2.2 C19_Amp1.2 C19_Amp2.2 C23.2 C24.2 C25.2 C26.1 C27.1 C29.2 C30.2 C31.2 D1.1 J1.5 J1.6 J1.7 J1.8 J1.9 J1.10 J1.11 P1.2 P3.2 P5.5 P6.6 SW1.2 U1.3 U1.5 U1.21 U2.4 U3.2 U6.1 U7.7 U7.18 U7.21 U7.25 | length 5481.4
  Top Routing w12: v1@1975,3610 2047.44,3537.56 C17.2 ; U1.5 3284.25,3640.06 C30.2@3317.56,3673.37 ; U1.3 3347.25,3600 3343.8,3600 3378.8,3635 3383.53,3635 3427.56,3679.03 C29.2
  Top Routing w20: v1(1597.44,4122.44) C19_Amp2.2 C18_Amp2.2 ; C13.2 1728.72,3163.72 1729,3164 v1(1820,3164) ; v1(1805,3830) 1842.44,3867.44 C14_Amp2.2 ; C16_Amp2.2 2057.56,3960 v1(2090,3960) ; U2.4 2294.09,3525 2235,3465.91 v1(2235,3449.5) 2235,3433.09 2248.09,3420 2475.08,3420 SW1.2 ; v1(2462.44,3712.44) C2.2 C3.2 ; C19_Amp1.2 C18_Amp1.2 2635,4135 v1(2665,4135) ; v1(2690,3894.88) 2719.76,3894.88 C14_Amp1.2 ; C16_Amp1.2 2910,3910 2925,3895 v1(2950,3895) ; v1(3105,3170) C31.2 ; C4.1 C5.1 3250,4040 U3.2 ; U1.21 3315.75,3190.16 3321,3184.91 3321,3184 v1(3335,3170) ; C30.2@3317.56,3673.37 C30.2 3317.56,3707.56 3340,3730 3405,3730 3427.56,3707.44 C29.2 ; D1.1 v1(3625,3170) ; 5V.1 3618.5,3691.5 P5.5
  Bottom Routing w12: C27.1 2450,4222.56 ; U7.18 2435,4068.11 2435,4115 2448,4128 2448,4220.56 2450,4222.56 ; v1(2462.44,3712.44) 2465,3715 C26.1 2557.44,3744.99 2541.4,3761.03 2541.4,3796.35 U7.7 ; U7.21 2513.11,4107.48 2535,4129.37 2535,4205 2517.44,4222.56 C25.2 2450,4222.56 ; U7.25 2615.47,4105.47 2645,4135 v1(2665,4135)
  Bottom Routing w20: v1(2235,3449.5) 2235,3297.44 J1.7 2207.95,3197.56 J1.9 J1.11 ; J1.5 2278.82,3173.94 J1.11 ; v1(2375,4300) 2410,4265 C27.1 ; J1.6 2452.05,3197.56 J1.8 J1.10 J1.11 ; C7.2 3332.44,4399.33 C9.2 3328.5,4360 3328.5,4230.22 3380,4178.72 U3.2 3497.71,4052.29 3497.71,3903.53 3466.63,3872.44 C10.2 3419.33,3831.77 C8.2 ; C23.2 3647.56,4353.37 3616.47,4322.28 3609.84,4322.28 3600,4312.44 U6.1 3725,4145 3725,3910.81 3686.63,3872.44 C24.2
  other v1: 1980,3605 3370,3730
LED1: R27.2 U1.23 | length 75.4
  Top Routing w10: U1.23 3380.47,3242.91 R27.2
MISO: P6.1 R3.2 U1.16 | length 873.1
  Top Routing w10: P6.1 2755,3275 2950,3275 2974.76,3299.76 U1.16
  Bottom Routing w10: P6.1 2747.03,3230 2791.56,3274.53 2817.5,3274.53 2854.53,3311.56 2854.53,3348.44 2834.53,3368.44 2834.53,3495 R3.2
MOSI: P6.4 R2.2 U1.15 | length 501.4
  Top Routing w10: P6.4 2854.53,3374.53 2928.44,3374.53 2972.97,3330 3133.39,3330 U1.15
  Bottom Routing w10: R2.2 2799.53,3340.47 P6.4
Net5V_2: 5V.2 R26.1 | length 60.8
  Top Routing w10: R26.1 3681.5,3868.03 5V.2
NetC4_2: C4.2 U1.8 X1.2 | length 583
  Top Routing w10: X1.2 3047.56,3810 C4.2 3189.76,3932.68 U1.8
NetC5_2: C5.2 U1.7 X1.1 | length 580.9
  Top Routing w10: U1.7 3221.26,3913.7 C5.2 3382.44,3810 X1.1
NetC6_2: C6.2 SW1.1 | length 186.3
  Top Routing w10: SW1.1 2556.42,3201.42 v1(2595,3240)
  Bottom Routing w10: C6.2 2542.44,3292.56 v1(2595,3240)
NetC27_2: C27.2 U7.17 | length 84.9
  Bottom Routing w10: U7.17 C27.2@2410.75,4151.69
NetD1_2: D1.2 R27.1 | length 69
  Top Routing w10: R27.1 D1.2
NetR9_1: R9.1 R10.2 R11.2 U5.3 | length 688.4
  Top Routing w10: R9.1 1909.53,3595 ; R11.2 1909.53,3529.76 1909.53,3595 ; U5.3 2046.59,3345 2078.7,3377.12 2078.7,3561.3 2004,3636 1941,3636 1909.53,3604.53 1909.53,3595
NetR18_1: R18.1 R19.2 R20.2 U5.5 | length 445.3
  Top Routing w10: R18.1 R19.2 1639.53,3529.77 R20.2 1774.29,3395 U5.5
NetR23_2: R23.2 RX1.2 | length 58
  Top Routing w10: RX1.2 R23.2@2438.03,4571.49
NetR24_2: R24.2 TX1.2 | length 60.8
  Top Routing w10: R24.2 2308.03,4569.53 TX1.2
NetRX1_1: RX1.1 U7.23 | length 531.2
  Top Routing w10: v1(2380,4450) RX1.1
  Bottom Routing w10: v1(2380,4450) 2580,4250 2580,4116.39 2564,4100.38 U7.23@2564,4066.77
NetTX1_1: TX1.1 U7.22 | length 565.8
  Top Routing w10: v1(2310,4450) TX1.1
  Bottom Routing w10: v1(2310,4450) 2330,4450 2560,4220 2560,4124.67 2538.7,4103.37 U7.22
SCK: P6.3 R4.2 U1.17 | length 951.3
  Top Routing w10: P6.3 2854.53,3185.47 2954.53,3185.47 3013.7,3244.65 U1.17
  Bottom Routing w10: R4.2 2866.57,3527.95 2866.57,3478.43 2954.53,3390.47 2954.53,3307.03 2922.03,3274.53 2891.56,3274.53 2847.03,3230 P6.3
USB_N: J1.2 U7.16 | length 820.6
  Bottom Routing w15: J1.2 2355.37,3275.53 2355.37,3740.21 2335.18,3760.41 2335.18,3975 2385.16,4024.98 U7.16
USB_P: J1.3 U7.15 | length 819.9
  Bottom Routing w15: J1.3 2330,3730.23 2310.18,3750.05 2310.18,4017.99 U7.15@2358.96,4066.77
WB1: P3.1 U2.3 U5.1 U5.2 | length 496.1
  Top Routing w10: U5.1 U5.2 2065,3295 2135,3365 2135,3465 P3.1 2245,3575 U2.3
WB1OUT: P3.3 U2.2 U5.6 U5.7 | length 935.3
  Top Routing w10: v1(1730,3345) U5.6 U5.7 ; P3.3 2245,3625 U2.2
  Bottom Routing w10: v1(1730,3345) 1730,3440 1990,3700 P3.3
pads on no net: J1.1 J1.4 R5_Amp1.1 R5_Amp2.1 R11.3 R13_Amp1.1 R13_Amp2.1 R20.3 SW1.3 SW1.4 U1.1 U1.2 U1.9 U1.10 U1.11 U1.12 U1.13 U1.19 U1.22 U1.27 U1.28 U1.32 U7.3 U7.6 U7.8 U7.9 U7.10 U7.11 U7.12 U7.13 U7.14 U7.19 U7.24 U7.26 U7.27 U7.28

## Polygon pours and split planes (outlines as drawn)
+5V on Power "Bottom Layer-No Net" (solid, pour order 0): 1380,4770 1390,4760 3855,4760 3855,2995 3875,2975 3790,3060 1290,3060
GND on GND Plane (split plane): 3759.43,3130.33 1461.04,3130.33 1461.04,4664.94 3759.43,4664.94

## Silkscreen, mask and mechanical layers (free items; w line width, h text height)
Top Overlay:
  text "+12V" at 3310,4615 h31.5
  text "GND" at 3450,4615 h31.5
  text "-12V" at 3550,4615 h31.5
  text "-5V" at 1700,4355 h31.5
  text "+IN" at 1810,4355 h31.5
  text "-IN" at 1905,4355 h31.5
  text "+5V" at 2010,4355 h31.5
  text "-5V" at 2590,4355 h31.5
  text "+IN" at 2700,4355 h31.5
  text "-IN" at 2795,4355 h31.5
  text "+5V" at 2900,4355 h31.5
  text "WB1" at 2105,3675 h31.5 r90
  text "GND" at 3530,3615 h31.5
  text "GND" at 2105,3560 h31.5 r90
  text "A3" at 3555,3520 h31.5
  text "WB2" at 2105,3450 h31.5 r90
  text "A2" at 3560,3375 h31.5
  text "A1" at 3565,3285 h31.5
  text "+5V" at 3635,3125 h31.5
Bottom Overlay:
  text "+" at 3680,4330 h60
  text "+" at 3660,3790 h60

## Text inside footprints (layer, text, board x,y; h text height)
J1: Mechanical 1 "PCB Edge" at 2850,3140 h39.37
P6: Top Overlay "6" at 2970,3310 h31.5; Top Overlay "5" at 2970,3210 h31.5; Top Overlay "2" at 2620,3315 h31.5; Top Overlay "1" at 2630,3210 h31.5